# Altium PCB PCB.PcbDoc
Units mm, origin at the board's own origin, x right, y up, seen from the top; angles counter-clockwise.
Board outline 50.8 x 69.34 mm, 2 copper layers (Top Layer, Bottom Layer); 93 components, 78 nets, 346 pads, 561 vias.
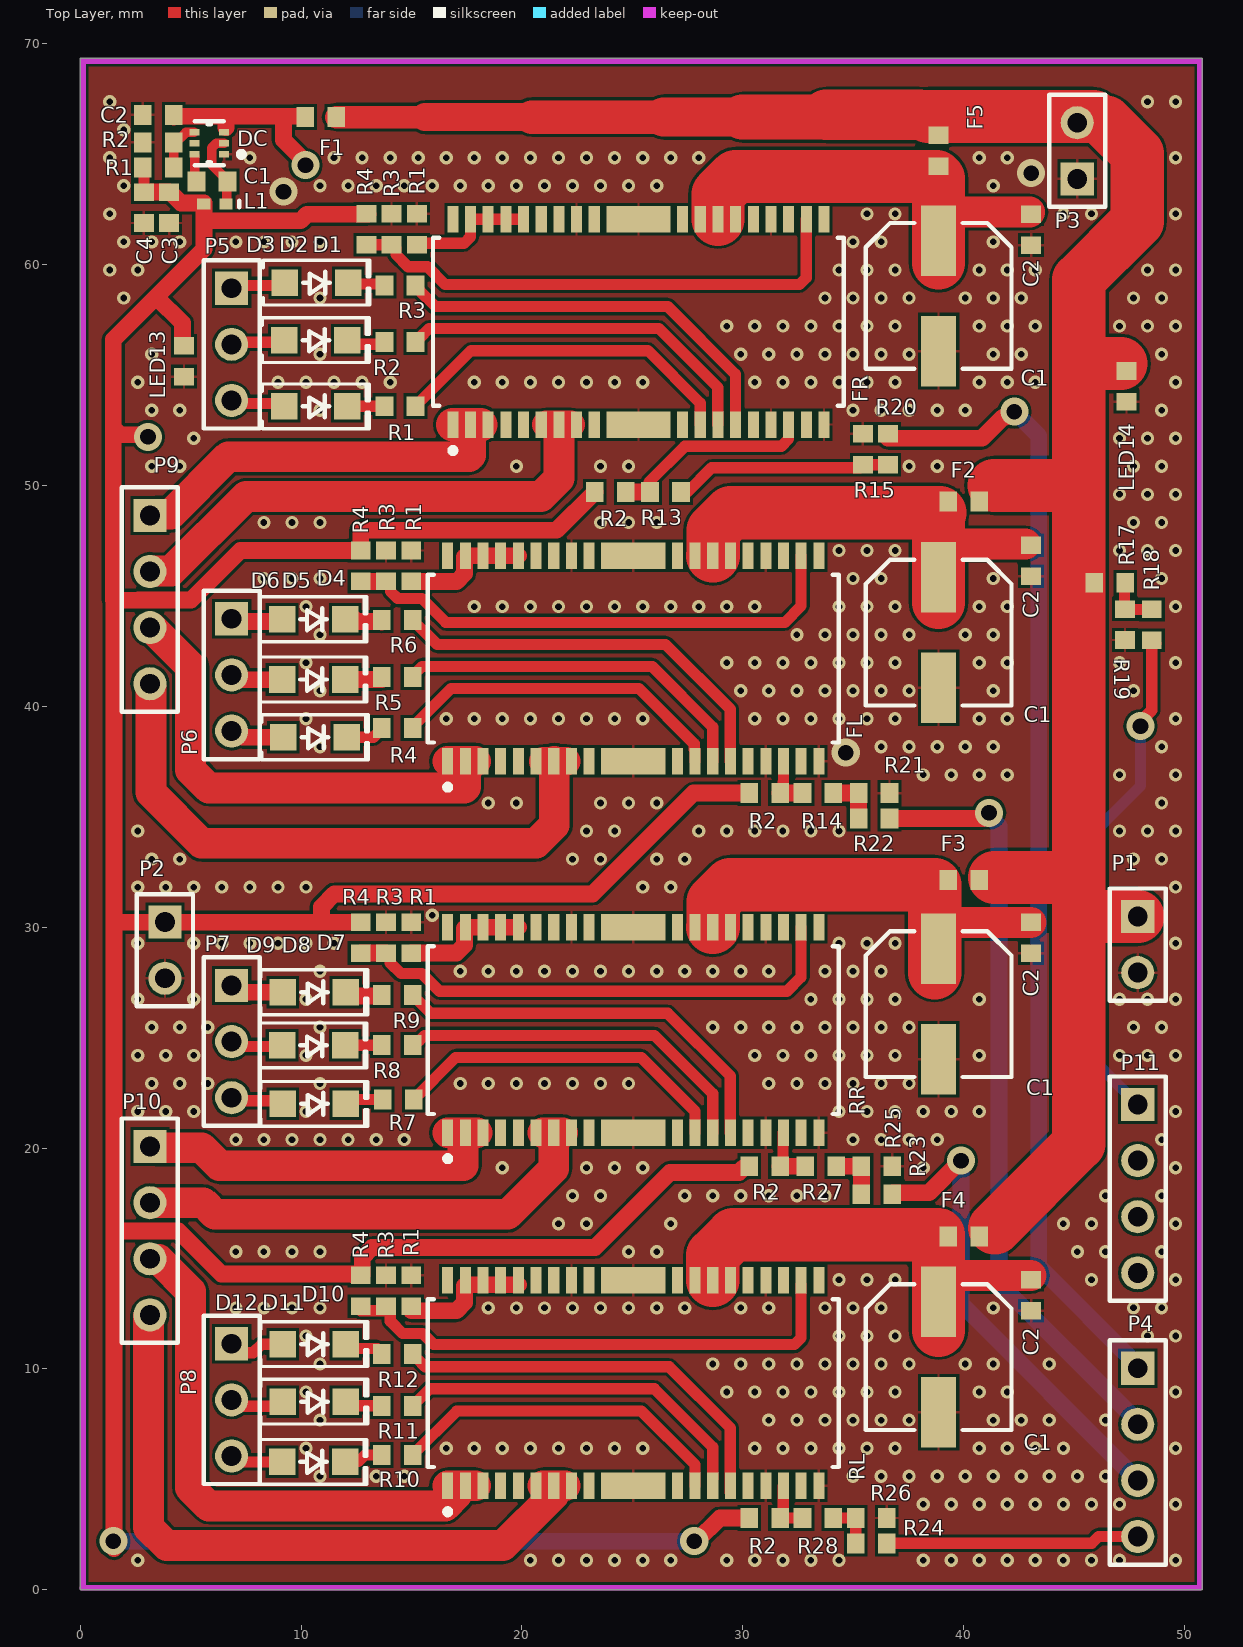
[diagram p0: Top Layer view]
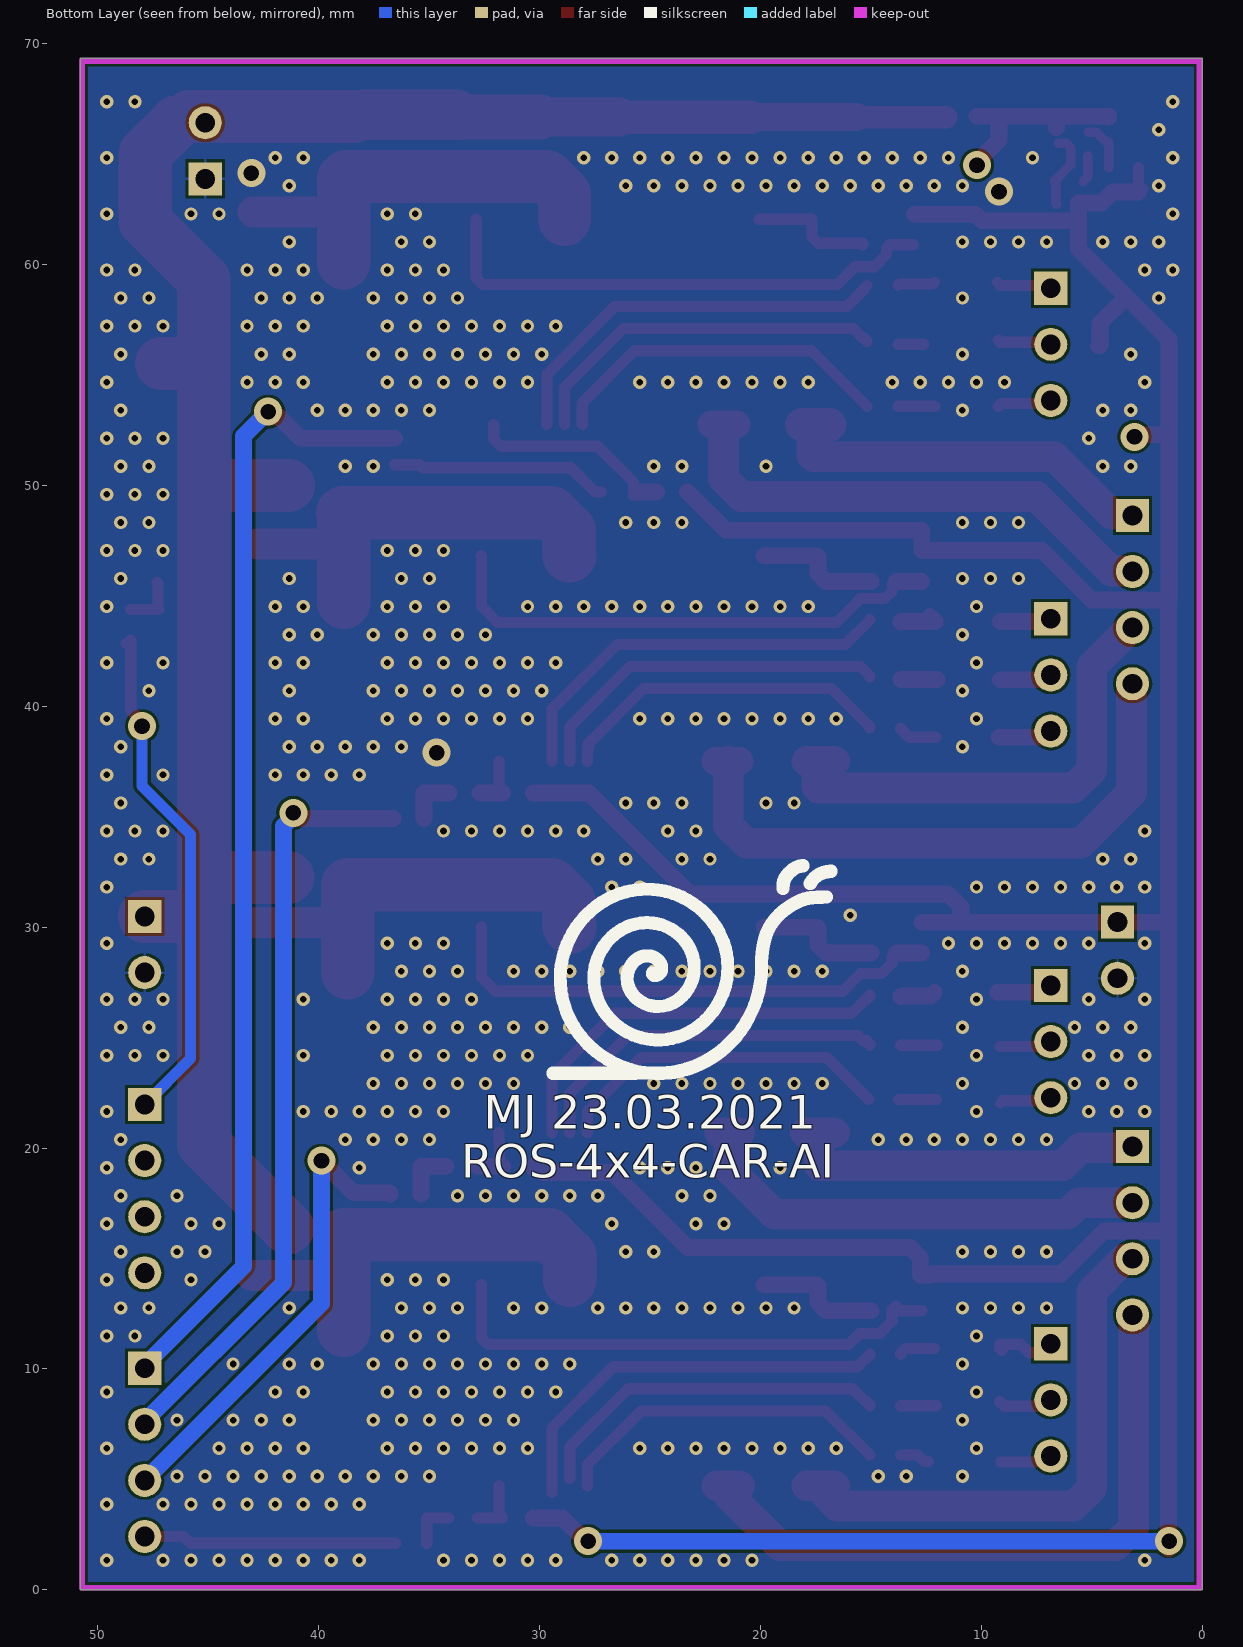
[diagram p1: Bottom Layer view, seen from below]

## Layer stack, top to bottom
Top Solder: solder mask 0.0102, Solder Resist, Dk 3.5
Top Layer: signal copper 0.0356
Dielectric 1: dielectric 0.32, FR-4, Dk 4.8
Bottom Layer: signal copper 0.0356
Bottom Solder: solder mask 0.0102, Solder Resist, Dk 3.5

## Board outline
0,0 0,69.342 50.8,69.342 50.8,0

## Design rules (kind name [scope] priority, off if disabled: settings)
BoardOutlineClearance [All] p1: gap=0.2 ignorepadtopadclearanceinfootprint=FALSE
Clearance [All] p1: gap=0.127 ignorepadtopadclearanceinfootprint=FALSE except(0.25: Arc-Hole Track-Hole SMDPad-Hole THPad-Hole Via-Hole Fill-Hole Poly-Hole Region-Hole Text-Hole)
ComponentClearance [All] p1: gap=0.127 collisioncheckmode=3 verticalgap=0.127 showdistances=TRUE
DiffPairsRouting [All] p1: maxlimit=0.254 minlimit=0.127 mostfreqgap=0.127 toplayer_minwidth=0.127 toplayer_maxwidth=25.4 toplayer_prefwidth=0.127 bottomlayer_minwidth=0.127 bottomlayer_maxwidth=25.4 bottomlayer_prefwidth=0.127 maxuncoupledlength=12.7
Height [All] p1: minheight=0 maxheight=1816.048 prefheight=12.7
HoleSize [All] p1: absolutevalues=TRUE maxlimit=6.3 minlimit=0.3 maxpercent=80.000 minpercent=20.000
HoleToHoleClearance [All] p1: gap=0.25 allowstackedmicrovias=FALSE
MinimumAnnularRing [All] p1: minimumring=0.076
MinimumSolderMaskSliver [All] p1: minsoldermaskwidth=0
PlaneClearance [All] p1: clearance=0.127
PlaneConnect PlaneConnectPowerPads [InPadClass('PowerPads')] p1: planeconnectstyle=Direct reliefexpansion=0.508 reliefentries=4 reliefconductorwidth=0.254 reliefairgap=0.254
PlaneConnect [All] p2: pad.planeconnectstyle=Relief pad.reliefexpansion=0.3 pad.reliefentries=4 pad.reliefconductorwidth=0.127 pad.reliefairgap=0.127 via.planeconnectstyle=Direct via.reliefexpansion=0.3 via.reliefentries=4 via.reliefconductorwidth=0.127 via.reliefairgap=0.127
PolygonConnect PolygonConnectPowerPads [All vs (InPadClass('PowerPads'))] p1: connectstyle=Direct reliefconductorwidth=0.254 reliefentries=4 polygonreliefangle="90 Angle" airgapwidth=0.254
PolygonConnect [All] p2: thpad.connectstyle=Relief thpad.reliefconductorwidth=0.127 thpad.reliefentries=4 thpad.polygonreliefangle="90 Angle" thpad.airgapwidth=0.127 smdpad.connectstyle=Relief smdpad.reliefconductorwidth=0.127 smdpad.reliefentries=4 smdpad.polygonreliefangle="90 Angle" smdpad.airgapwidth=0.127 via.connectstyle=Direct via.reliefconductorwidth=0.127 via.reliefentries=4 via.polygonreliefangle="90 Angle" via.airgapwidth=0.127
RoutingVias [All] p1: holewidth=0.3 width=0.6 viastyle="Through Hole" minholewidth=0.3 minwidth=0.6 maxholewidth=0.6 maxwidth=6.6
SilkToSilkClearance [All] p1: silktosilkclearance=0
SilkToSolderMaskClearance [IsPad] p1: minsilkscreentomaskgap=0.127 clearancetoexposedcopper=TRUE
SolderMaskExpansion [All] p1: expansion=0.075 istentingtop=FALSE
Width [All] p1: maxlimit=25.4 minlimit=0.127 preferedwidth=0.127 minimp=50.000000 maximp=50.000000 favimp=50.000000
20 further rules are at their usual default settings.

## Classes and differential pairs
channel class DriverCircuit: U_DriverCircuit1 U_DriverCircuit2 U_DriverCircuit3 U_DriverCircuit4
component class U_DriverCircuit4: C1_DC.5 C2_DC.5 R3_DC.5 R4_DC.5
component class U_DriverCircuit1: $ComponentPrefix$ComponentIndex R3_DC.5 R4_DC.5
component class U_5VCircuit: *1_5V.1
component class PowerFull_car_engineSteering: F2_m.6 F3_m.6 F4_m.6 F5_m.6 P3_m.6 pt

## Components (designator, comment, footprint, x,y, rotation, side; value= is the part's Value field where it differs from the comment)
C1 "100µF" "CAP ALSMD 6.6MM H6.1MM" 38.862,58.579 r270 top (schematic designator C1_DC)
C1 "100µF" "CAP ALSMD 6.6MM H6.1MM" 38.862,43.338 r270 top (schematic designator C1_DC)
C1 "100µF" "CAP ALSMD 6.6MM H6.1MM" 38.862,26.518 r270 top (schematic designator C1_DC)
C1 "100µF" "CAP ALSMD 6.6MM H6.1MM" 38.862,10.535 r270 top (schematic designator C1_DC)
C1 "Cap" 1608[0603] 5.969,63.754 r180 top value=100pF (schematic designator C1_5V)
C2 "Cap" 1608[0603] 43.053,61.579 r90 top value=100pF (schematic designator C2_DC)
C2 "Cap" 1608[0603] 43.053,46.592 r90 top value=100pF (schematic designator C2_DC)
C2 "Cap" 1608[0603] 43.053,29.518 r90 top value=100pF (schematic designator C2_DC)
C2 "Cap" 1608[0603] 43.053,13.335 r90 top value=100pF (schematic designator C2_DC)
C2 "Cap" 1608[0603] 3.533,66.775 r0 top value=100pF (schematic designator C2_5V)
C3 "Cap" 1608[0603] 4.026,62.578 r90 top value=100pF (schematic designator C3_5V)
C4 "Cap" 1608[0603] 2.883,62.578 r90 top value=100pF (schematic designator C4_5V)
D1 "RBR2MM30ATFTR" SOD123F 10.668,53.578 r0 top (schematic designator D1_m)
D2 "RBR2MM30ATFTR" SOD123F 10.668,56.58 r0 top (schematic designator D2_m)
D3 "RBR2MM30ATFTR" SOD123F 10.701,59.182 r0 top (schematic designator D3_m)
D4 "RBR2MM30ATFTR" SOD123F 10.63,38.6 r0 top (schematic designator D4_m)
D5 "RBR2MM30ATFTR" SOD123F 10.568,41.213 r0 top (schematic designator D5_m)
D6 "RBR2MM30ATFTR" SOD123F 10.568,43.94 r0 top (schematic designator D6_m)
D7 "RBR2MM30ATFTR" SOD123F 10.6,22 r0 top (schematic designator D7_m)
D8 "RBR2MM30ATFTR" SOD123F 10.568,24.649 r0 top (schematic designator D8_m)
D9 "RBR2MM30ATFTR" SOD123F 10.601,27.051 r0 top (schematic designator D9_m)
D10 "RBR2MM30ATFTR" SOD123F 10.568,5.791 r0 top (schematic designator D10_m)
D11 "RBR2MM30ATFTR" SOD123F 10.601,8.52 r0 top (schematic designator D11_m)
D12 "RBR2MM30ATFTR" SOD123F 10.601,11.122 r0 top (schematic designator D12_m)
DC "AP62301Z6-7" SOT-563-6 5.844,65.491 r180 top (schematic designator *1_5V)
F1 "Fuse 2" 1608[0603] 10.891,66.675 r180 top (schematic designator F1_m)
F2 "Fuse 2" 1608[0603] 40.005,49.276 r0 top (schematic designator F2_m)
F3 "Fuse 2" 1608[0603] 40.005,32.131 r0 top (schematic designator F3_m)
F4 "Fuse 2" 1608[0603] 40.005,16.002 r0 top (schematic designator F4_m)
F5 "Fuse 2" 1608[0603] 38.862,65.151 r90 top (schematic designator F5_m)
FL "BD63150AFM-E2" Rohm_HSOP-M36_MFG 25.039,42.163 r90 top (schematic designator *1_DC)
FR "BD63150AFM-E2" Rohm_HSOP-M36_MFG 25.273,57.404 r90 top (schematic designator *1_DC)
L1 "Inductor" 0402-A 6.096,62.738 r180 top value=10mH (schematic designator L1_5V)
LED13 "LED2" 1608[0603] 4.699,55.626 r270 top (schematic designator D13_m)
LED14 "LED2" 1608[0603] 47.371,54.483 r270 top (schematic designator D14_m)
P1 "Header 2" HDR1X2 47.879,30.48 r270 top (schematic designator P1_m)
P2 "Header 2" HDR1X2 3.837,30.226 r270 top (schematic designator P2_m)
P3 "Header 2" HDR1X2 45.139,63.881 r90 top (schematic designator P3_m)
P4 "Header 4" HDR1X4 47.879,10.033 r270 top (schematic designator P4_m)
P5 "Header 3" HDR1X3 6.858,58.928 r270 top (schematic designator P5_m)
P6 "Header 3" HDR1X3 6.858,43.961 r270 top (schematic designator P6_m)
P7 "Header 3" HDR1X3 6.858,27.359 r270 top (schematic designator P7_m)
P8 "Header 3" HDR1X3 6.858,11.141 r270 top (schematic designator P8_m)
P9 "Header 4" HDR1X4 3.156,48.641 r270 top (schematic designator P9_m)
P10 "Header 4" HDR1X4 3.156,20.066 r270 top (schematic designator P10_m)
P11 "Header 4" HDR1X4 47.879,21.971 r270 top (schematic designator P11_m)
R1 "Res1" 1608[0603] 14.478,53.586 r0 top value=1K (schematic designator R1_m)
R1 "Res1" 1608[0603] 15.24,61.595 r90 top value=1K (schematic designator R1_DC)
R1 "Res1" 1608[0603] 14.986,46.355 r90 top value=1K (schematic designator R1_DC)
R1 "Res1" 1608[0603] 14.986,29.526 r90 top value=1K (schematic designator R1_DC)
R1 "Res1" 1608[0603] 14.986,13.535 r90 top value=1K (schematic designator R1_DC)
R1 "Res1" 1608[0603] 3.533,64.389 r0 top value=1K (schematic designator R1_5V)
R2 "Res1" 1608[0603] 14.478,56.488 r0 top value=1K (schematic designator R2_m)
R2 "Res1" 1608[0603] 24,49.7 r0 top value=10K (schematic designator R2_DC)
R2 "Res1" 1608[0603] 30.988,36.068 r0 top value=10K (schematic designator R2_DC)
R2 "Res1" 1608[0603] 30.988,19.177 r0 top value=10K (schematic designator R2_DC)
R2 "Res1" 1608[0603] 30.988,3.248 r0 top value=10K (schematic designator R2_DC)
R2 "Res1" 1608[0603] 3.533,65.532 r180 top value=1K (schematic designator R2_5V)
R3 "Res1" 1608[0603] 14.097,61.595 r90 top value=1K (schematic designator R3_DC)
R3 "Res1" 1608[0603] 14.478,59.055 r0 top value=1K (schematic designator R3_m)
R3 "Res1" 1608[0603] 13.843,46.355 r90 top value=1K (schematic designator R3_DC)
R3 "Res1" 1608[0603] 13.843,29.526 r90 top value=1K (schematic designator R3_DC)
R3 "Res1" 1608[0603] 13.843,13.535 r90 top value=1K (schematic designator R3_DC)
R4 "Res1" 1608[0603] 12.954,61.595 r270 top value=1K (schematic designator R4_DC)
R4 "Res1" 1608[0603] 14.351,39.019 r0 top value=1K (schematic designator R4_m)
R4 "Res1" 1608[0603] 12.7,46.355 r270 top value=1K (schematic designator R4_DC)
R4 "Res1" 1608[0603] 12.7,29.526 r270 top value=1K (schematic designator R4_DC)
R4 "Res1" 1608[0603] 12.7,13.535 r270 top value=1K (schematic designator R4_DC)
R5 "Res1" 1608[0603] 14.351,41.321 r0 top value=1K (schematic designator R5_m)
R6 "Res1" 1608[0603] 14.351,43.915 r0 top value=1K (schematic designator R6_m)
R7 "Res1" 1608[0603] 14.4,22.2 r0 top value=1K (schematic designator R7_m)
R8 "Res1" 1608[0603] 14.351,24.657 r0 top value=1K (schematic designator R8_m)
R9 "Res1" 1608[0603] 14.351,26.924 r0 top value=1K (schematic designator R9_m)
R10 "Res1" 1608[0603] 14.351,6.099 r0 top value=1K (schematic designator R10_m)
R11 "Res1" 1608[0603] 14.351,8.328 r0 top value=1K (schematic designator R11_m)
R12 "Res1" 1608[0603] 14.351,10.668 r0 top value=1K (schematic designator R12_m)
R13 "Res1" 1608[0603] 26.5,49.7 r180 top value=10K (schematic designator R13_m)
R14 "Res1" 1608[0603] 33.401,36.068 r180 top value=10K (schematic designator R14_m)
R15 "Res1" 1608[0603] 36.576,51.635 r270 top value=1K (schematic designator R15_m)
R17 "Res1" 1608[0603] 46.609,45.593 r180 top value=10K (schematic designator R17_m)
R18 "Res1" 1608[0603] 48.514,43.688 r90 top value=1K (schematic designator R18_m)
R19 "Res1" 1608[0603] 47.3,43.7 r90 top value=43K (schematic designator R19_m)
R20 "Res1" 1608[0603] 35.433,51.635 r270 top value=43K (schematic designator R20_m)
R21 "Res1" 1608[0603] 35.941,36.068 r180 top value=43K (schematic designator R21_m)
R22 "Res1" 1608[0603] 35.941,34.925 r180 top value=1K (schematic designator R22_m)
R23 "Res1" 1608[0603] 36.068,17.907 r180 top value=1K (schematic designator R23_m)
R24 "Res1" 1608[0603] 35.814,2.105 r180 top value=1K (schematic designator R24_m)
R25 "Res1" 1608[0603] 36.068,19.177 r0 top value=43K (schematic designator R25_m)
R26 "Res1" 1608[0603] 35.814,3.248 r0 top value=43K (schematic designator R26_m)
R27 "Res1" 1608[0603] 33.528,19.177 r0 top value=10K (schematic designator R27_m)
R28 "Res1" 1608[0603] 33.401,3.248 r0 top value=10K (schematic designator R28_m)
RL "BD63150AFM-E2" Rohm_HSOP-M36_MFG 25.039,9.359 r90 top (schematic designator *1_DC)
RR "BD63150AFM-E2" Rohm_HSOP-M36_MFG 25.039,25.343 r90 top (schematic designator *1_DC)

## Footprints (in the part's own frame and the unit in brackets; to place one, negate y for a bottom-side part, rotate by r counter-clockwise, add the part's x,y. Pads: shape width x height; smd on the part's side, far side on the other; paste and mask are expansions set on the pad)
0402-A [mm] "Chip Inductor, Body 1.0x0.5mm, IPC High Density"
  rect 0.6x0.5 smd: 1(-0.5,0) 2(0.5,0)
  silkscreen extent -1.1,-0.15 -1.1,0.15, body extent -0.55,-0.3 0.55,0.3, height 0.55
1608[0603] [mm] "Chip Capacitor, Body 1.6x0.8mm, IPC High Density"
  rect 0.8x0.9 smd: 1(-0.7,0) 2(0.7,0)
  body extent -0.87,-0.48 0.87,0.48, height 1.3
"CAP ALSMD 6.6MM H6.1MM" [mm] "Aluminum Electrolytic Capacitor, Body 6.60x6.60x6.10mm, IPC Low Density"
  rect 3.2x1.6 smd: 1(-2.5,0) 2(2.5,0)
  silkscreen extent -3.3,-3.3 3.3,3.3, body extent -3.5,-3.3 3.5,3.3, height 6.1
HDR1X2 [mm] "Connector; Header; 2 Position"
  rect 1.5x1.5 hole 0.9: 1(0,0)
  round 1.5 hole 0.9: 2(2.54,0)
  silkscreen extent -1.27,-1.27 3.81,1.27
HDR1X3 [mm] "Connector; Header; 3 Position"
  rect 1.5x1.5 hole 0.9: 1(0,0)
  round 1.5 hole 0.9: 2(2.54,0) 3(5.08,0)
  silkscreen extent -1.27,-1.27 6.35,1.27
HDR1X4 [mm] "Connector; Header; 4 Position"
  rect 1.5x1.5 hole 0.9: 1(0,0)
  round 1.5 hole 0.9: 2(2.54,0) 3(5.08,0) 4(7.62,0)
  silkscreen extent -1.27,-1.27 8.89,1.27
Rohm_HSOP-M36_MFG [mm]
  rect 1.2x0.5 smd paste+0 mask+0: 1(-4.65,8.4) 2(-4.65,7.6) 3(-4.65,6.8) 4(-4.65,6) 5(-4.65,5.2) 6(-4.65,4.4) 7(-4.65,3.6) 8(-4.65,2.8) 9(-4.65,2) 10(-4.65,-2) 11(-4.65,-2.8) 12(-4.65,-3.6) 13(-4.65,-4.4) 14(-4.65,-5.2) 15(-4.65,-6) 16(-4.65,-6.8) 17(-4.65,-7.6) 18(-4.65,-8.4) 19(4.65,-8.4) 20(4.65,-7.6) 21(4.65,-6.8) 22(4.65,-6) 23(4.65,-5.2) 24(4.65,-4.4) 25(4.65,-3.6) 26(4.65,-2.8) 27(4.65,-2) 28(4.65,2) 29(4.65,2.8) 30(4.65,3.6) 31(4.65,4.4) 32(4.65,5.2) 33(4.65,6) 34(4.65,6.8) 35(4.65,7.6) 36(4.65,8.4)
  rect 1.2x2.9 smd paste+0 mask+0: FIN(-4.65,0) FIN(4.65,0)
  silkscreen extent -5.95,-9.3 3.8,9.3, body extent -5.35,-9.4 5.35,9.4, height 0.25
SOD123F [mm] "SODFL, 2-Leads, Body 1.60x3.50mm, IPC Medium Density"
  rect 1.2x1.2 smd: 1(-1.43,0) 2(1.43,0)
  silkscreen extent -2.41,-1.02 2.41,1.02, body extent -1.75,-0.8 1.75,0.8, height 1.1
SOT-563-6 [mm]
  rect 0.45x0.3 smd paste+0 mask+0: 1(-0.675,0.5) 2(-0.675,0) 3(-0.675,-0.5) 4(0.675,-0.5) 5(0.675,0) 6(0.675,0.5)
  silkscreen extent -1.58,-1 0.65,1, body extent -1,-0.95 1,0.95, height 0.25

## Part data
C1 C1 C1 C1: library part UWZ1A101MCL1GB, "CAP ALUM 100UF 20% 10V SMD", Device Package="Radial, Can - SMD", Lifetime @ Temp.="1000 Hrs @ 105°C", Manufacturer=Nichicon, Operating Temperature="-55°C ~ 105°C", Ripple Current @ High Frequency="90mA @ 10kHz", Ripple Current @ Low Frequency="60mA @ 120Hz", Supplier Part Number 1=493-9991-1-ND, Tolerance=±20%, Voltage - Rated=10V, Applications="High Temperature Reflow", Capacitance=100µF, ComponentLink1Description=Datasheet, ComponentLink1URL=http://nichicon-us.com/english/products/pdfs/e-uwz.pdf, ComponentLink2Description="DigiKey Link", ComponentLink2URL=http://digikey.com/product-detail/en/nichicon/UWZ1A101MCL1GB/493-9991-1-ND/3973963, Height - Seated (Max)="0.224\" (5.70mm)", LastUpdated="02.09.2020 01:18:40", Lifecycle Status=Active, Minimum Order=1, Mounting Type="Surface Mount", Package / Case="Radial, Can - SMD", Packaging=TapeAndReel, Part Number=UWZ1A101MCL1GB, Part Status=Active, PartId=9046, Polarization=Polar, Price=0.11, Series=UWZ, Size / Dimension="0.248\" Dia (6.30mm)", Supplier 1=DigiKey, Surface Mount Land Size="0.260\" L x 0.260\" W (6.60mm x 6.60mm)"
C1 C2 C2 C2 C2 C2 C3 C4: "Capacitor", LatestRevisionDate=17-Jul-2002, LatestRevisionNote="Re-released for DXP Platform.", PackageDescription="Radial Cap, Thru-Hole; 2 Leads; 0.3 in Pin Spacing", PackageReference=RAD-0.3, Published=8-Jun-2000, Publisher="Altium Limited"
D1 D2 D3 D4 D5 D6 D7 D8 D9 D10 D11 D12: "DIODE (RECTIFIER FRD) 30V-VR 2A-", Current - Average Rectified (Io)=2A, Current - Reverse Leakage @ Vr="50µA @ 30V", Manufacturer="Rohm Semiconductor", Operating Temperature - Junction="150°C (Max)", Package / Case=SOD-123F, Supplier Device Package=PMDU, Supplier Part Number 1=RBR2MM30ATFCT-ND, Voltage - DC Reverse (Vr) (Max)=30V, Voltage - Forward (Vf) (Max) @ If="530mV @ 2A", ComponentLink1Description=Datasheet, ComponentLink1URL=https://www.rohm.com/datasheet/RBR2MM30ATF/rbr2mm30atftr-e, ComponentLink2Description="DigiKey Link", ComponentLink2URL=http://digikey.com/product-detail/en/rohm-semiconductor/RBR2MM30ATFTR/RBR2MM30ATFCT-ND/9748240, Diode Type=Schottky, LastUpdated="02.09.2020 01:19:10", Lifecycle Status=Active, Minimum Order=1, Mounting Type="Surface Mount", Packaging=TapeAndReel, Part Number=RBR2MM30ATFTR, Part Status=Active, PartId=2445, Price=0.10, Series="Automotive, AEC-Q101", Speed="Fast Recovery =< 500ns, > 200mA (Io)", Supplier 1=DigiKey
DC: "Switching Voltage Regulators DCDC Conv HV Buck SOT563 T&R 3K"
F1 F2 F3 F4 F5: "Fuse", LatestRevisionDate=17-Jul-2002, LatestRevisionNote="Re-released for DXP Platform.", PackageDescription="Thru-Hole; 2 Leads", PackageReference=PIN-W2/E2.8, Published=8-Jun-2000, Publisher="Altium Limited"
FL FR RL RR: "DC Driver", Supplier Part Number 1=21AH3191, Supplier 1=Newark
LED13 LED14: "Typical RED, GREEN, YELLOW, AMBER GaAs LED", LatestRevisionDate=17-Jul-2002, LatestRevisionNote="Re-released for DXP Platform.", PackageDescription="SM LED; 2 Flat Leads", PackageReference=3.2X1.6X1.1, PackageVersion=Feb-2002, Published=8-Jun-2000, Publisher="Altium Limited"
P1 P2 P3: "Header, 2-Pin", LatestRevisionDate=17-Jul-2002, LatestRevisionNote="Re-released for DXP Platform.", Publisher="Altium Limited"
P4 P9 P10 P11: "Header, 4-Pin", LatestRevisionDate=17-Jul-2002, LatestRevisionNote="Re-released for DXP Platform.", Publisher="Altium Limited"
P5 P6 P7 P8: "Header, 3-Pin", LatestRevisionDate=17-Jul-2002, LatestRevisionNote="Re-released for DXP Platform.", Publisher="Altium Limited"
R1 R1 R1 R1 R1 R1 R2 R2 R2 R2 R2 R2 R3 R3 R3 R3 R3 R4 R4 R4 R4 R4 R5 R6 R7 R8 R9 R10 R11 R12 R13 R14 R15 R17 R18 R19 R20 R21 R22 R23 R24 R25 R26 R27 R28: "Resistor", LatestRevisionDate=17-Jul-2002, LatestRevisionNote="Re-released for DXP Platform.", PackageDescription="Axial Device, Thru-Hole; 2 Leads; 0.3 in Pin Spacing", PackageReference=AXIAL-0.3, Published=8-Jun-2000, Publisher="Altium Limited"
L1: Code_IEC=1005, Code_JEITA=0402, LatestRevisionDate=29-May-2009, LatestRevisionNote="IPC-7351 Footprint Added.", PackageDescription="Chip Inductor", PackageReference=0402-A, Published=8-Jun-2000, Publisher="Altium Limited"

## Via types
v1: diameter 0.6, hole 0.3, Top Layer to Bottom Layer, 550 vias
v2: diameter 1.27, hole 0.711, Top Layer to Bottom Layer, 11 vias

## Nets (pads, with @x,y where several pads share a name; then routed paths per layer and width w, separated by ;. In a path a pad name is that pad's centre, name@x,y a point inside that pad or via, vN(x,y) a via of type N, cw(c..) or ccw(c..) an arc to the next point about the centre after c; other vN are vias at no path point)
5V: C3.2 C4.2 L1.2 LED13.1 P2.1 R1.1@2.833,64.389 R2.1@23.3,49.7 R2.1@30.288,3.248 R2.1@30.288,19.177 R2.1@30.288,36.068 R4.1@12.7,14.235 R4.1@12.7,30.226 R4.1@12.7,47.055 R4.1@12.954,62.295 | length 197.6
  Top Layer w0.508: C4.2@2.687,63.424 2.833,63.278 C4.2 ; C4.2@2.887,63.424 R1.1@2.887,64.389
  Top Layer w0.762: 1.5,44.8 1.5,52.297 1.5,52.6 ; v2@1.532,1.867 1.532,16.244 ; C4.2 C3.2 4.045,63.259 4.095,63.259 4.568,62.786 L1.2@5.548,62.786 ; v2(3.069,52.2) 2.972,52.297 1.803,52.297 1.5,52.6 ; LED13.1 4.649,56.326 4.63,56.345 4.63,57.346 3.438,58.538 ; L1.2@5.6,62.786 5.6,61.98 5.6,60.7 3.438,58.538 ; 5.746,61.98 9.978,61.98 10.274,62.276 R4.1@13.023,62.276 ; R4.1@12.7,14.235 12.681,14.254 12.37,14.254 12.324,14.3 6.4,14.3 4.456,16.244 1.532,16.244 ; R4.1@12.7,30.226 10.922,30.226 ; R4.1@12.769,14.254 12.769,15.054 13.215,15.5 23.3,15.5 26.7,18.9 29.823,18.9 30.031,19.108 30.269,19.108 30.288,19.127 R2.1@30.288,19.177 ; R2.1@23.3,49.7 21.569,47.97 12.7,47.97 12.7,47.055 7.255,47.055 5.019,44.819 2.635,44.819 2.616,44.8 1.532,44.8 1.532,30.2 ; v2(27.8,2.2) 27.909,2.2 28.957,3.248 R2.1@30.288,3.248 ; R2.1@30.288,36.068 27.768,36.068 23.2,31.5 11.5,31.5 10.922,30.922 10.922,30.226 ; 1.5,52.6 1.5,56.6 3.438,58.538 ; 1.532,16.244 1.532,30.2 ; 1.532,30.2 1.558,30.226 P2.1 10.922,30.226
  Bottom Layer w0.762: v2(1.5,2.2) v2(27.8,2.2)
12V: F1.1 F2.2 F3.2 F4.2 F5.2 LED14.1 P1.1 P3.2 R17.2 | length 97.9
  Top Layer w1.016: F1.1 15.621,66.675
  Top Layer w1.27: 15.621,66.675 20.447,66.675
  Top Layer w1.524: 20.447,66.675 26.416,66.675
  Top Layer w1.778: 26.416,66.675 29.972,66.675
  Top Layer w2.032: 29.972,66.675 33.782,66.675
  Top Layer w2.286: 33.782,66.775 37.988,66.775
  Top Layer w2.413: 38.4,66.7 45.859,66.7 ; 41.37,50 44.831,50 ; 41.402,16.383 45.212,20.193 45.212,30.353 ; 41.402,32.25 45.212,32.25 ; 46.369,55.517 LED14.1@47.117,55.517 ; 46.445,66.436 47.859,65.023 ; 47.852,65.007 47.852,61.949 45.212,59.309 45.212,49.4 45.212,32.25 ; P1.1 45.339,30.48 45.212,30.353 ; 45.212,30.353 45.212,32.25
12V_MEAS: P11.1 R18.1 | length 23.3
  Top Layer w0.508: v2(48,39.1) 48,39.306 48.514,39.82 R18.1 48.66,42.842 R18.1@48.71,42.842
  Bottom Layer w0.508: P11.1 45.8,24.05 45.8,34.2 48,36.4 v2(48,39.1)
EnableEn1.1: D2.2 R2.1@13.778,56.488 | length 1.2
  Top Layer w0.508: D2.2@12.606,56.388 R2.1@13.778,56.388
EnableEn2.1: D5.2 R5.1 | length 1.7
  Top Layer w0.762: D5.2 R5.1@13.651,41.213
EnOut_FL_1: FL.1 FL.2 FL.3 P9.3 | length 22.4
  Top Layer w1.397: P9.3@3.204,43.541 3.259,43.541 5,41.8 5,37.118 5.818,36.3 17.4,36.3 17.439,36.339 FL.2 ; FL.1 FL.2 ; 17.9,37.513 FL.2
EnOut_FL_2: FL.6 FL.7 FL.8 P9.4 | length 28.3
  Top Layer w1.27: 20.955,37.513 FL.7 21.463,37.513 FL.8@22.027,37.513
  Top Layer w1.397: P9.4@3.2,40.837 3.2,36.1 5.5,33.8 20.645,33.8 21.463,34.618 FL.7@21.463,37.513
EnOut_FR_1: FR.1 FR.2 FR.3 P9.1 | length 18.2
  Top Layer w0.508: FR.3@18.261,52.754 FR.3
  Top Layer w1.397: P9.1@3.408,48.693 4.093,48.693 6.7,51.3 17.61,51.3 17.673,51.363 FR.2
  Top Layer w1.524: FR.1 FR.2 18.134,52.754
EnOut_FR_2: FR.6 FR.7 FR.8 P9.2 | length 23.4
  Top Layer w0.508: FR.6@20.869,52.75 FR.6
  Top Layer w1.27: FR.6@21.085,52.754 FR.7 FR.8@22.225,52.754
  Top Layer w1.397: P9.2@3.204,46.121 4.121,46.121 7.5,49.5 20.855,49.5 21.673,50.318 FR.7@21.673,52.373
EnOut_RL_1: P10.3 RL.1 RL.2 RL.3 | length 25.2
  Top Layer w1.397: P10.3@3.204,14.966 3.548,14.966 5,13.514 5,4.618 5.818,3.8 16.53,3.8 17.039,4.309 ; RL.1 RL.2 17.907,4.709
EnOut_RL_2: P10.4 RL.6 RL.7 RL.8 | length 30.7
  Top Layer w1.397: P10.4 3.156,12.418 3.1,12.362 3.1,2.818 3.918,2 19.148,2 21.439,4.291 RL.7 ; 20.955,4.709 RL.7 ; 21.963,4.709 RL.7
EnOut_RR_1: P10.1 RR.1 RR.2 RR.3 | length 17.2
  Top Layer w1.397: P10.1@3.356,20.066 3.408,20.014 5.486,20.014 6.3,19.2 17.337,19.2 17.339,19.202 RR.2@17.339,20.693 ; RR.1 RR.2@17.339,20.693 ; 17.963,20.693 RR.2 RR.2@17.339,20.693
EnOut_RR_2: P10.2 RR.6 RR.7 RR.8 | length 21.6
  Top Layer w1.397: P10.2@3.404,17.526 5.574,17.526 6.1,17 19.358,17 21.439,19.081 RR.7 ; 20.955,20.693 RR.7 ; 21.844,20.693 RR.7
FAILA_U_DriverCircuit1: R2.2@31.688,3.248 R28.1 RL.16 | length 2.7
  Top Layer w0.508: RL.16 31.835,4.705 31.835,3.445 31.688,3.298 31.688,3.248 R28.1@32.828,3.248
FAILA_U_DriverCircuit2: R2.2@31.688,19.177 R27.1 RR.16 | length 2.7
  Top Layer w0.508: R2.2@31.688,19.177 31.816,19.305 31.816,20.174 31.835,20.193 31.835,20.689 RR.16
  Top Layer w0.762: R2.2@31.688,19.177 R27.1
FAILA_U_DriverCircuit3: FL.16 R2.2@31.688,36.068 R14.2 | length 2.5
  Top Layer w0.508: R2.2@31.688,36.068 31.834,36.214 31.834,36.557 31.839,36.562 FL.16
  Top Layer w0.762: R2.2@31.688,36.068 R14.2
FAILA_U_DriverCircuit4: FR.16 R2.2@24.7,49.7 R13.2 | length 9.3
  Top Layer w0.508: R13.2@25.746,49.546 25.746,50.146 27.373,51.773 31.748,51.773 32.073,52.098 FR.16
  Top Layer w0.762: R2.2@24.703,49.703 R13.2@25.6,49.703
FL_IN1: D4.1 P6.3 | length 2.5
  Top Layer w0.762: P6.3 7.058,38.881 7.339,38.6 D4.1
FL_IN2: D5.1 P6.2 | length 2.4
  Top Layer w0.762: P6.2@6.779,41.2 D5.1@9.138,41.2
FL_PS: D6.1 P6.1 | length 2.3
  Top Layer w0.762: P6.1 6.979,43.84 D6.1@9.138,43.84
FR_IN1: D1.1 P5.3 | length 2.5
  Top Layer w0.508: P5.3 6.993,53.713 9.103,53.713 D1.1
FR_IN2: D2.1 P5.2 | length 2.5
  Top Layer w0.508: P5.2 6.954,56.484 9.142,56.484 D2.1
FR_PS: D3.1 P5.1 | length 2.5
  Top Layer w0.508: P5.1@6.758,58.928 P5.1@6.885,59.055 ; P5.1@6.985,59.055 9.144,59.055 D3.1
GND: C1.2@38.862,8.035 C1.2@38.862,24.018 C1.2@38.862,40.838 C1.2@38.862,56.079 C2.1 C3.1 C4.1 DC.1 FL.15 FL.18 FL.22 FL.29 FL.FIN FR.15 FR.18 FR.22 FR.29 FR.FIN LED13.2 LED14.2 P1.2 P2.2 P3.1 R1.2@14.986,14.235 R1.2@14.986,30.226 R1.2@14.986,47.055 R1.2@15.24,62.295 R2.2@2.833,65.532 R3.2@13.843,14.235 R3.2@13.843,30.226 R3.2@13.843,47.055 R3.2@14.097,62.295 R19.1 R20.1 R21.1 R25.2 R26.2 RL.15 RL.18 RL.22 RL.29 RL.FIN RR.15 RR.18 RR.22 RR.29 RR.FIN
  other v1: 2.603,1.333 20.383,1.333 21.653,1.333 22.924,1.333 24.194,1.333 25.463,1.333 26.733,1.333 29.273,1.333 30.543,1.333 31.813,1.333 33.084,1.333 34.353,1.333 38.163,1.333 39.433,1.333 40.703,1.333 41.974,1.333 43.243,1.333 44.514,1.333 45.783,1.333 47.053,1.333 49.593,1.333 38.163,3.873 39.433,3.873 40.703,3.873 41.974,3.873 43.243,3.873 44.514,3.873 45.783,3.873 47.053,3.873 49.593,3.873 10.858,5.143 13.399,5.143 14.668,5.143 34.989,5.143 36.258,5.143 37.529,5.143 38.798,5.143 40.069,5.143 41.338,5.143 42.608,5.143 43.878,5.143 45.148,5.143 46.419,5.143 10.223,6.413 16.573,6.413 17.843,6.413 19.113,6.413 20.383,6.413 21.653,6.413 22.924,6.413 24.194,6.413 25.463,6.413 30.543,6.413 31.813,6.413 33.084,6.413 34.353,6.413 35.623,6.413 36.893,6.413 40.703,6.413 41.974,6.413 43.243,6.413 44.514,6.413 49.593,6.413 10.858,7.683 31.178,7.683 32.448,7.683 33.718,7.683 34.989,7.683 36.258,7.683 37.529,7.683 41.338,7.683 42.608,7.683 43.878,7.683 46.419,7.683 10.223,8.954 29.273,8.954 30.543,8.954 31.813,8.954 33.084,8.954 34.353,8.954 35.623,8.954 36.893,8.954 40.703,8.954 41.974,8.954 49.593,8.954 10.858,10.223 28.639,10.223 29.909,10.223 31.178,10.223 32.448,10.223 33.718,10.223 34.989,10.223 36.258,10.223 37.529,10.223 40.069,10.223 41.338,10.223 43.878,10.223 10.223,11.493 34.353,11.493 35.623,11.493 36.893,11.493 48.323,11.493 49.593,11.493 7.048,12.763 8.319,12.763 9.588,12.763 10.858,12.763 18.479,12.763 19.748,12.763 21.018,12.763 22.288,12.763 23.558,12.763 24.828,12.763 26.098,12.763 27.368,12.763 29.909,12.763 31.178,12.763 33.718,12.763 34.989,12.763 36.258,12.763 41.338,12.763 47.688,12.763 48.959,12.763 34.353,14.034 35.623,14.034 36.893,14.034 45.783,14.034 49.593,14.034 7.048,15.303 8.319,15.303 9.588,15.303 10.858,15.303 24.828,15.303 26.098,15.303 45.148,15.303 46.419,15.303 48.959,15.303 21.653,16.573 22.924,16.573 26.733,16.573 44.514,16.573 45.783,16.573 49.593,16.573 22.288,17.843 23.558,17.843 27.368,17.843 28.639,17.843 29.909,17.843 31.178,17.843 32.448,17.843 33.718,17.843 46.419,17.843 48.959,17.843 19.113,19.113 22.924,19.113 24.194,19.113 25.463,19.113 38.163,19.113 49.593,19.113 7.048,20.383 8.319,20.383 9.588,20.383 10.858,20.383 12.128,20.383 13.399,20.383 14.668,20.383 34.989,20.383 36.258,20.383 37.529,20.383 38.798,20.383 48.959,20.383 2.603,21.653 3.873,21.653 5.143,21.653 10.223,21.653 34.353,21.653 35.623,21.653 36.893,21.653 38.163,21.653 39.433,21.653 40.703,21.653 49.593,21.653 3.238,22.924 4.508,22.924 5.779,22.924 10.858,22.924 17.209,22.924 18.479,22.924 19.748,22.924 21.018,22.924 22.288,22.924 23.558,22.924 24.828,22.924 31.178,22.924 32.448,22.924 33.718,22.924 34.989,22.924 36.258,22.924 37.529,22.924 2.603,24.194 3.873,24.194 5.143,24.194 10.223,24.194 30.543,24.194 31.813,24.194 33.084,24.194 34.353,24.194 35.623,24.194 36.893,24.194 40.703,24.194 47.053,24.194 48.323,24.194 49.593,24.194 3.238,25.463 4.508,25.463 5.779,25.463 10.858,25.463 28.639,25.463 29.909,25.463 31.178,25.463 32.448,25.463 33.718,25.463 34.989,25.463 36.258,25.463 37.529,25.463 47.688,25.463 48.959,25.463 2.603,26.733 5.143,26.733 10.223,26.733 33.084,26.733 34.353,26.733 35.623,26.733 36.893,26.733 40.703,26.733 47.053,26.733 48.323,26.733 49.593,26.733 10.858,28.003 17.209,28.003 18.479,28.003 19.748,28.003 21.018,28.003 22.288,28.003 23.558,28.003 24.828,28.003 26.098,28.003 27.368,28.003 28.639,28.003 29.909,28.003 31.178,28.003 33.718,28.003 34.989,28.003 36.258,28.003 2.603,29.273 5.143,29.273 6.413,29.273 7.683,29.273 8.954,29.273 10.223,29.273 11.493,29.273 34.353,29.273 35.623,29.273 36.893,29.273 49.593,29.273 15.938,30.543 2.603,31.813 3.873,31.813 5.143,31.813 6.413,31.813 7.683,31.813 8.954,31.813 10.223,31.813 25.463,31.813 26.733,31.813 49.593,31.813 3.238,33.084 4.508,33.084 22.288,33.084 23.558,33.084 26.098,33.084 27.368,33.084 47.688,33.084 48.959,33.084 2.603,34.353 22.924,34.353 24.194,34.353 28.003,34.353 29.273,34.353 30.543,34.353 31.813,34.353 33.084,34.353 34.353,34.353 47.053,34.353 48.323,34.353 49.593,34.353 18.479,35.623 19.748,35.623 23.558,35.623 24.828,35.623 26.098,35.623 48.959,35.623 38.163,36.893 39.433,36.893 40.703,36.893 41.974,36.893 47.053,36.893 49.593,36.893 10.858,38.163 36.258,38.163 37.529,38.163 38.798,38.163 40.069,38.163 41.338,38.163 48.959,38.163 10.223,39.433 16.573,39.433 17.843,39.433 19.113,39.433 20.383,39.433 21.653,39.433 22.924,39.433 24.194,39.433 25.463,39.433 30.543,39.433 31.813,39.433 33.084,39.433 34.353,39.433 35.623,39.433 36.893,39.433 40.703,39.433 41.974,39.433 49.593,39.433 10.858,40.703 29.909,40.703 31.178,40.703 32.448,40.703 33.718,40.703 34.989,40.703 36.258,40.703 37.529,40.703 41.338,40.703 47.688,40.703 10.223,41.974 29.273,41.974 30.543,41.974 31.813,41.974 33.084,41.974 34.353,41.974 35.623,41.974 36.893,41.974 40.703,41.974 41.974,41.974 47.053,41.974 49.593,41.974 10.858,43.243 32.448,43.243 33.718,43.243 34.989,43.243 36.258,43.243 37.529,43.243 40.069,43.243 41.338,43.243 10.223,44.514 17.843,44.514 19.113,44.514 20.383,44.514 21.653,44.514 22.924,44.514 24.194,44.514 25.463,44.514 26.733,44.514 28.003,44.514 29.273,44.514 30.543,44.514 34.353,44.514 35.623,44.514 36.893,44.514 40.703,44.514 41.974,44.514 49.593,44.514 8.319,45.783 9.588,45.783 10.858,45.783 34.989,45.783 36.258,45.783 41.338,45.783 48.959,45.783 34.353,47.053 35.623,47.053 36.893,47.053 47.053,47.053 48.323,47.053 49.593,47.053 8.319,48.323 9.588,48.323 10.858,48.323 23.558,48.323 24.828,48.323 26.098,48.323 47.688,48.323 48.959,48.323 47.053,49.593 48.323,49.593 49.593,49.593 3.238,50.863 4.508,50.863 19.748,50.863 23.558,50.863 24.828,50.863 37.529,50.863 38.798,50.863 47.688,50.863 48.959,50.863 5.143,52.133 47.053,52.133 48.323,52.133 49.593,52.133 3.238,53.404 4.508,53.404 10.858,53.404 34.989,53.404 36.258,53.404 37.529,53.404 38.798,53.404 40.069,53.404 48.959,53.404 2.603,54.673 8.954,54.673 10.223,54.673 11.493,54.673 12.763,54.673 14.034,54.673 17.843,54.673 19.113,54.673 20.383,54.673 21.653,54.673 22.924,54.673 24.194,54.673 25.463,54.673 30.543,54.673 31.813,54.673 33.084,54.673 34.353,54.673 35.623,54.673 36.893,54.673 40.703,54.673 41.974,54.673 43.243,54.673 49.593,54.673 3.238,55.944 10.858,55.944 29.909,55.944 31.178,55.944 32.448,55.944 33.718,55.944 34.989,55.944 36.258,55.944 37.529,55.944 41.338,55.944 42.608,55.944 48.959,55.944 29.273,57.213 30.543,57.213 31.813,57.213 33.084,57.213 34.353,57.213 35.623,57.213 36.893,57.213 40.703,57.213 41.974,57.213 43.243,57.213 47.053,57.213 48.323,57.213 49.593,57.213 1.968,58.483 10.858,58.483 33.718,58.483 34.989,58.483 36.258,58.483 37.529,58.483 40.069,58.483 41.338,58.483 42.608,58.483 47.688,58.483 48.959,58.483 1.333,59.753 2.603,59.753 34.353,59.753 35.623,59.753 36.893,59.753 40.703,59.753 41.974,59.753 43.243,59.753 48.323,59.753 49.593,59.753 1.968,61.023 3.238,61.023 4.508,61.023 7.048,61.023 8.319,61.023 9.588,61.023 10.858,61.023 34.989,61.023 36.258,61.023 41.338,61.023 1.333,62.293 35.623,62.293 36.893,62.293 44.514,62.293 45.783,62.293 49.593,62.293 1.968,63.563 10.858,63.563 12.128,63.563 13.399,63.563 14.668,63.563 15.938,63.563 17.209,63.563 18.479,63.563 19.748,63.563 21.018,63.563 22.288,63.563 23.558,63.563 24.828,63.563 26.098,63.563 41.338,63.563 1.333,64.834 7.683,64.834 11.493,64.834 12.763,64.834 14.034,64.834 15.303,64.834 16.573,64.834 17.843,64.834 19.113,64.834 20.383,64.834 21.653,64.834 22.924,64.834 24.194,64.834 25.463,64.834 26.733,64.834 28.003,64.834 40.703,64.834 41.974,64.834 49.593,64.834 1.968,66.103 1.333,67.373 48.323,67.373 49.593,67.373
  other v2: 34.66,37.902 9.2,63.3 43.053,64.135
IN1_U_DriverCircuit1: R10.2 RL.11 | length 15.6
  Top Layer w0.508: R10.2 17.052,8.1 25.4,8.1 27.835,5.665 27.835,4.713 RL.11
IN1_U_DriverCircuit2: R7.2 RR.11 | length 15.5
  Top Layer w0.508: R7.2 17,24.1 25.4,24.1 27.835,21.665 27.835,20.697 RR.11
IN1_U_DriverCircuit3: FL.11 R4.2@15.051,39.019 | length 15.4
  Top Layer w0.508: R4.2@15.051,39.019 15.051,39.069 16.782,40.8 25.3,40.8 27.8,38.3 27.8,38.048 27.835,38.013 27.835,37.517 FL.11
IN1_U_DriverCircuit4: FR.11 R1.2@15.178,53.586 | length 15.9
  Top Layer w0.508: R1.2@15.178,53.586 17.692,56.1 25.7,56.1 28.069,53.731 28.069,52.758 FR.11
IN2_U_DriverCircuit1: R11.2 RL.12 | length 16.4
  Top Layer w0.508: R11.2 15.051,8.378 15.197,8.524 15.247,8.524 15.823,9.1 26,9.1 28.635,6.465 RL.12@28.635,5.055
IN2_U_DriverCircuit2: R8.2 RR.12 | length 16.7
  Top Layer w0.508: R8.2 15.051,24.707 15.197,24.853 15.348,24.853 15.595,25.1 26,25.1 28.635,22.465 28.635,20.697 RR.12
IN2_U_DriverCircuit3: FL.12 R5.2 | length 16.5
  Top Layer w0.508: R5.2 15.051,41.371 15.48,41.8 25.9,41.8 28.635,39.065 28.635,37.517 FL.12
IN2_U_DriverCircuit4: FR.12 R2.2@15.178,56.488 | length 16.8
  Top Layer w0.508: R2.2@15.178,56.488 15.178,56.538 15.324,56.684 15.374,56.684 15.79,57.1 26.2,57.1 28.869,54.431 28.869,52.758 FR.12
Net*1_5V.1_2: C1.1@6.669,63.754 DC.2 L1.1 | length 3.5
  Top Layer w0.432: DC.2@6.512,65.484 6.152,65.484 5.952,65.283 5.952,64.521 C1.1@6.669,63.804 ; L1.1 6.598,62.738 6.632,62.772 6.632,63.717 C1.1@6.669,63.754
Net*1_5V.1_3: C2.2@4.233,66.775 DC.3 F1.2 | length 9.1
  Top Layer w0.762: C2.2@4.233,66.675 4.233,66.696 4.252,66.715 6.6,66.715 ; 6.6,66.203 6.6,66.715 ; F1.2@10.191,66.715 9.2,66.715 ; v2(10.2,64.5) 10.2,64.637 9.2,65.637 9.2,66.715 ; 6.6,66.715 9.2,66.715
Net*1_5V.1_4: DC.4 R1.2@4.233,64.389 R2.1@4.233,65.532 | length 2.3
  Top Layer w0.432: R1.2@4.233,64.389 R2.1@4.233,65.432 ; R2.1@4.233,65.532 R2.1@4.233,65.432 ; DC.4 5.162,65.984 5.091,65.984 5.02,65.984 4.786,65.984 R2.1@4.233,65.432
Net*1_5V.1_5: DC.5
Net*1_5V.1_6: C1.2@5.269,63.754 DC.6 | length 1.3
  Top Layer w0.432: DC.6@5.179,64.925 5.179,63.971 C1.2@5.396,63.754
Net*1_DC.2_20: R3.1@13.843,12.835 R4.2@12.7,12.835 RL.20 | length 23.6
  Top Layer w0.508: R4.2@12.7,12.635 R3.1@13.843,12.635 ; R3.1@13.843,12.835 13.893,12.835 R3.1@14.039,12.689 ; R3.1@13.893,12.689 R3.1@14.039,12.689 ; RL.20@32.639,13.809 32.635,13.805 32.635,11.398 32.337,11.1 16.008,11.1 15.508,11.6 14.6,11.6 14.039,12.161 R3.1@14.039,12.689
Net*1_DC.2_32: R1.1@14.986,12.835 RL.32 RL.33 RL.34 RL.35 | length 5.8
  Top Layer w0.762: R1.1@14.986,12.635 17.034,12.635 17.397,12.998 17.397,13.767 17.439,13.809 18.239,13.809 19.039,13.809 RL.32@19.839,13.809
Net*1_DC.3_20: R3.1@13.843,28.826 R4.2@12.7,28.826 RR.20 | length 23.3
  Top Layer w0.508: R3.1@13.843,28.826 13.893,28.826 14.039,28.68 14.039,28.384 14.523,27.9 15.464,27.9 16.264,27.1 32,27.1 32.635,27.735 32.635,29.989 RR.20
  Top Layer w0.762: R4.2@12.7,28.826 R3.1@13.843,28.826
Net*1_DC.3_32: R1.1@14.986,28.826 RR.32 RR.33 RR.34 RR.35 | length 5.8
  Top Layer w0.762: R1.1@14.986,28.826 17.04,28.826 17.397,29.183 17.397,29.951 RR.35 RR.34 RR.33 RR.32
Net*1_DC.4_20: FL.20 R3.1@13.843,45.655 R4.2@12.7,45.655 | length 23.2
  Top Layer w0.508: R3.1@13.843,45.655 13.893,45.655 R3.1@14.039,45.509 ; 14.046,45.206 14.378,44.874 15.481,44.874 16.555,43.8 31.9,43.8 32.635,44.535 32.635,46.809 FL.20
  Top Layer w0.762: R4.2@12.7,45.655 R3.1@13.843,45.655
Net*1_DC.4_32: FL.32 FL.33 FL.34 FL.35 R1.1@14.986,45.655 | length 5.8
  Top Layer w0.762: R1.1@14.986,45.655 17.05,45.655 17.397,46.002 17.397,46.771 FL.35 FL.34 FL.33 FL.32
Net*1_DC.5_20: FR.20 R3.1@14.097,60.895 R4.2@12.954,60.895 | length 23.5
  Top Layer w0.508: R4.2@13.081,60.895 R3.1@14.147,60.895 ; R3.1@14.097,60.895 R3.1@14.147,60.895 ; FR.20 32.869,62.05 32.869,59.398 32.571,59.1 16.522,59.1 15.722,59.9 14.846,59.9 14.293,60.453 14.293,60.749 R3.1@14.147,60.895
Net*1_DC.5_32: FR.32 FR.33 FR.34 FR.35 R1.1@15.24,60.895 | length 5.7
  Top Layer w0.508: R1.1@15.367,60.895 R1.1@15.417,60.895 ; R1.1@15.367,60.96 17.371,60.96 17.669,61.258 17.669,62.05 FR.35 FR.34 FR.33 FR.32
NetD1_m.6_2: D1.2 R1.1@13.778,53.586 | length 1.7
  Top Layer w0.508: D1.2 12.102,53.582 13.774,53.582 R1.1@13.778,53.586
NetD3_m.6_2: D3.2 R3.1@13.778,59.055 | length 1.7
  Top Layer w0.508: D3.2 12.194,59.118 13.715,59.118 R3.1@13.778,59.055
NetD4_m.6_2: D4.2 R4.1@13.651,39.019 | length 1.8
  Top Layer w0.508: D4.2 13.282,38.6 13.651,38.969 R4.1@13.651,39.019
NetD6_m.6_2: D6.2 R6.1 | length 1.9
  Top Layer w0.762: D6.2@12.317,44.059 12.098,43.84 13.632,43.84 13.651,43.821 R6.1@13.651,43.815
NetD7_m.6_2: D7.2 R7.1 | length 1.7
  Top Layer w0.508: D7.2@12.03,22.2 R7.1@13.745,22.2
NetD8_m.6_2: D8.2 R8.1 | length 1.7
  Top Layer w0.508: D8.2 12.002,24.653 13.647,24.653 R8.1
NetD9_m.6_2: D9.2 R9.1 | length 1.6
  Top Layer w0.762: D9.2@12.131,27.051 12.3,26.882 13.566,26.882 13.582,26.866 R9.1@13.632,26.866
NetD10_m.6_2: D10.2 R10.1 | length 1.4
  Top Layer w0.508: D10.2@12.41,5.803 12.603,5.803 12.899,6.099 R10.1
NetD11_m.6_2: D11.2 R11.1 | length 1.6
  Top Layer w0.508: D11.2@12.031,8.328 R11.1
NetD12_m.6_2: D12.2 R12.1 | length 1.7
  Top Layer w0.508: D12.2@12.131,10.922 13.447,10.922 13.651,10.718 R12.1
NetP4_1: P4.1 R15.1 | length 51.7
  Top Layer w0.762: R15.1@36.576,52.135 40.832,52.135 41.783,53.086 41.9,53.086 42.154,53.34 v2(42.291,53.34)
  Bottom Layer w0.762: v2(42.291,53.34) 43.4,52.231 43.4,14.639 P4.1@47.879,10.16
NetP4_2: P4.2 R22.1 | length 35
  Top Layer w0.762: R22.1 40.894,34.925 v2(41.148,35.179)
  Bottom Layer w0.762: v2(41.148,35.179) 41.148,35.042 41.6,34.59 41.6,13.899 P4.2@47.879,7.62
NetP4_3: P4.3 R23.1 | length 21.6
  Top Layer w0.762: R23.1 36.768,17.957 36.787,17.976 38.423,17.976 v2(39.878,19.431)
  Bottom Layer w0.762: v2(39.878,19.431) 39.878,12.954 P4.3
NetP4_4: P4.4 R24.1 | length 11.5
  Top Layer w0.508: R24.1 45.793,2.105 46.101,2.413 P4.4
NetR13_m_1: R13.1 R15.2 R20.2 | length 9.9
  Top Layer w0.508: R13.1 27.49,49.7 28.59,50.8 35.298,50.8 R20.2 R15.2
NetR14_m_1: R14.1 R21.2 R22.2 | length 2.3
  Top Layer w0.762: R14.1 R21.2 R22.2
NetR17_m.6_1: R17.1 R18.2 R19.2 | length 2.5
  Top Layer w0.508: R17.1 47.276,45.56 47.276,44.421 47.244,44.388 R18.2
NetR23_m_2: R23.2 R25.1 R27.2 | length 2.4
  Top Layer w0.762: R27.2 R25.1 R23.2
NetR24_m_2: R24.2 R26.1 R28.2 | length 2.2
  Top Layer w0.508: R28.2 R26.1 R24.2
PS_U_DriverCircuit1: R12.2 RL.13 | length 18.7
  Top Layer w0.508: R12.2 15.051,10.618 15.197,10.472 15.247,10.472 15.619,10.1 26.665,10.1 29.435,7.33 RL.13@29.435,4.4
PS_U_DriverCircuit2: R9.2 RR.13 | length 18.5
  Top Layer w0.508: R9.2 15.051,26.874 15.197,26.728 15.247,26.728 15.875,26.1 26.6,26.1 29.435,23.265 29.435,20.697 RR.13
PS_U_DriverCircuit3: FL.13 R6.2 | length 18.4
  Top Layer w0.508: R6.2 16.166,42.8 26.5,42.8 29.435,39.865 29.435,37.517 FL.13
PS_U_DriverCircuit4: FR.13 R3.2@15.178,59.055 | length 18.5
  Top Layer w0.508: R3.2@15.178,59.055 15.324,58.909 15.324,58.859 16.083,58.1 26.6,58.1 29.669,55.031 29.669,52.758 FR.13
RL_IN1: D10.1 P8.3 | length 2.4
  Top Layer w0.508: P8.3@6.758,5.791 D10.1
RL_IN2: D11.1 P8.2 | length 3.2
  Top Layer w0.508: P8.2@6.758,8.201 P8.2@6.958,8.401 ; P8.2@6.758,8.601 P8.2@6.958,8.401 ; P8.2@7.216,8.411 6.968,8.411 P8.2@6.958,8.401 ; D11.1 8.966,8.315 7.044,8.315 P8.2@6.958,8.401
RL_PS: D12.1 P8.1 | length 2.5
  Top Layer w0.508: P8.1@6.949,10.731 7.831,10.731 8.222,11.122 D12.1 ; D12.1@9.077,10.828 D12.1@9.171,10.922
RR_IN1: D7.1 P7.3 | length 2.4
  Top Layer w0.432: P7.3 P7.3@6.997,22.14 ; D7.1@9.03,22.14 D7.1
  Top Layer w0.508: P7.3@6.997,22.14 D7.1@9.03,22.14
RR_IN2: D8.1 P7.2 | length 2.3
  Top Layer w0.508: P7.2@6.858,24.6 D8.1@9.157,24.6
RR_PS: D9.1 P7.1 | length 2.2
  Top Layer w0.762: P7.1@7.045,27.051 D9.1@9.271,27.051
VCC_U_DriverCircuit1: C1.1@38.862,13.035 C2.2@43.053,14.035 F4.1 RL.24 RL.25 RL.26 | length 20.5
  Top Layer w1.397: C1.1@38.862,14.605 C1.1@39.432,14.035 ; C1.1@39.432,14.235 C2.2@43.053,14.235
  Top Layer w2.413: RL.25 28.639,15.144 29.57,16.075 38.862,16.075 38.862,14.805 ; C1.1@38.862,11.757 C1.1@38.862,13.035 ; C1.1@38.862,12.835 C1.1@38.862,14.605
VCC_U_DriverCircuit2: C1.1@38.862,29.018 C2.2@43.053,30.218 F3.1 RR.24 RR.25 RR.26 | length 19.4
  Top Layer w1.397: C1.1@39.124,30.218 C2.2@43.053,30.218
  Top Layer w2.413: RR.25 28.656,30.01 28.656,31.145 29.437,31.927 38.685,31.927 38.685,30.218 38.685,29.018 C1.1@38.685,27.94
VCC_U_DriverCircuit3: C1.1@38.862,45.838 C2.2@43.053,47.292 F2.1 FL.24 FL.25 FL.26 | length 19.8
  Top Layer w1.397: C1.1@38.862,47.346 C2.2@42.8,47.346
  Top Layer w2.413: FL.25@28.656,46.813 FL.25 28.656,46.829 28.656,47.965 29.459,48.768 38.91,48.768 38.862,48.72 38.862,47.346 38.862,45.838 C1.1@38.862,44.704
VCC_U_DriverCircuit4: C1.1@38.862,61.079 C2.2@43.053,62.279 F5.1 FR.24 FR.25 FR.26 | length 19
  Top Layer w0.508: C2.2@42.988,62.312 C2.2@43.053,62.377
  Top Layer w1.397: C1.1@39.408,62.377 C2.2@42.988,62.377
  Top Layer w2.413: FR.25 28.873,63.19 29.671,63.988 38.755,63.988 38.862,63.881 38.862,61.079 C1.1@38.862,60.071
pads on no net: FL.4 FL.5 FL.9 FL.10 FL.14 FL.17 FL.19 FL.21 FL.23 FL.27 FL.28 FL.30 FL.31 FL.36 FR.4 FR.5 FR.9 FR.10 FR.14 FR.17 FR.19 FR.21 FR.23 FR.27 FR.28 FR.30 FR.31 FR.36 P11.2 P11.3 P11.4 RL.4 RL.5 RL.9 RL.10 RL.14 RL.17 RL.19 RL.21 RL.23 RL.27 RL.28 RL.30 RL.31 RL.36 RR.4 RR.5 RR.9 RR.10 RR.14 RR.17 RR.19 RR.21 RR.23 RR.27 RR.28 RR.30 RR.31 RR.36

## Polygon pours and split planes (outlines as drawn)
GND on Bottom Layer "GND_L02_P001" (solid, pour order 1): 0,0 50.8,0 50.8,69.342 0,69.342
GND on Top Layer "GND_L01_P000" (solid, pour order 0): 0,0 50.8,0 50.8,69.342 0,69.342

## Keep-outs
Keep-Out Layer:
  lines w0.254: 0.1,0.1 50.7,0.1 50.7,69.215 0.125,69.215 0.125,0.1

## Silkscreen, mask and mechanical layers (free items; w line width, h text height)
Bottom Overlay:
  drawing of 8774 lines, arcs and shapes, not listed
  text "MJ 23.03.2021" at 32.528,20.875 h1.52
  text "ROS-4x4-CAR-AI" at 33.546,18.654 h1.52